# Altium PCB BlanceCar.PcbDoc
Units mil, origin at the board's own origin, x right, y up, seen from the top; angles counter-clockwise.
Board outline 6000 x 4000 mil, 2 copper layers (Top Layer, Bottom Layer); 138 components, 110 nets, 503 pads, 0 vias.
Unrouted connection lines stored in the file: 323.
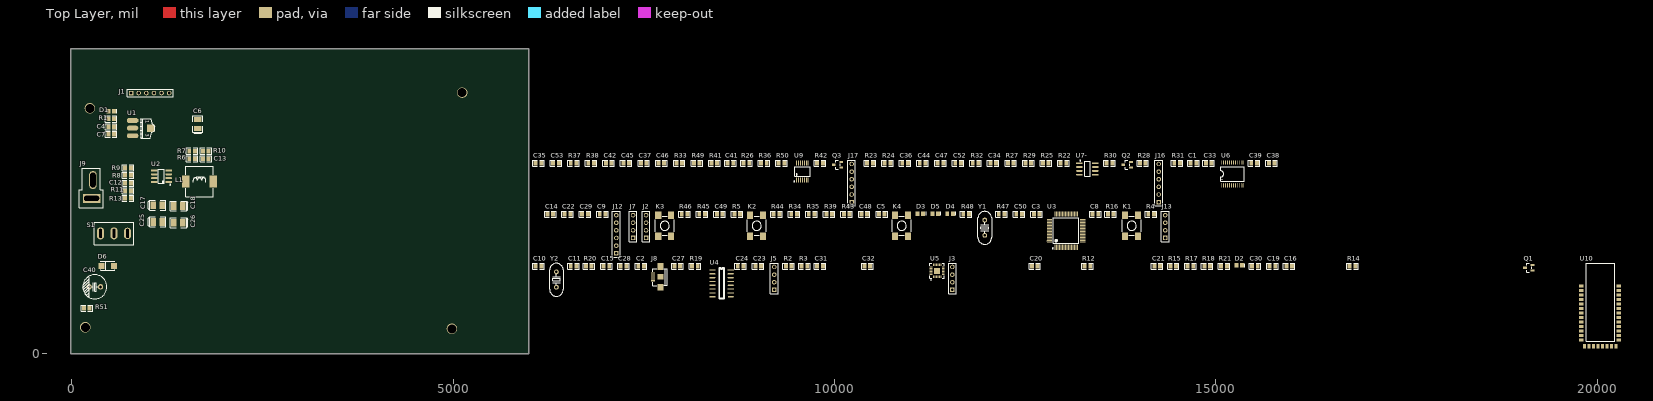
[diagram p0: Top Layer view]
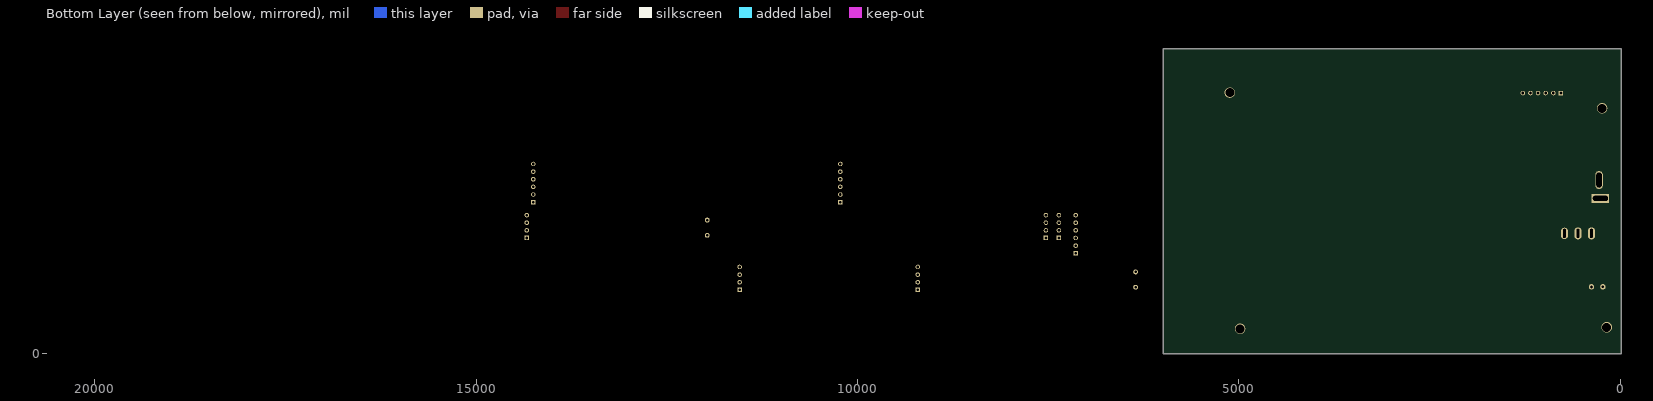
[diagram p1: Bottom Layer view, seen from below]

## Layer stack, top to bottom
Top Layer: signal copper 1.4
Dielectric: dielectric 12.6, FR-4, Dk 4.8
Bottom Layer: signal copper 1.4

## Board outline
-10,0 5990,0 5990,4000 -10,4000

## Design rules (kind name [scope] priority, off if disabled: settings)
Clearance [All] p1: gap=10
ComponentClearance [All] p1: gap=10 collisioncheckmode=3 verticalgap=10
PolygonConnect [All] p1: connectstyle=Relief reliefconductorwidth=10 reliefentries=4 polygonreliefangle="90 Angle"
RoutingVias [All] p1: holewidth=28 width=50 viastyle="Through Hole" minholewidth=28 minwidth=50 maxholewidth=28 maxwidth=50
SolderMaskExpansion [All] p1: expansion=4
TestPointUsage [All] p1: valid=0 allowmultiple=FALSE
Testpoint [All] p1: side=15 testpointundercomponent=TRUE minsize=40 maxsize=100 preferedsize=60 minholesize=0 maxholesize=40 preferedholesize=32 testpointgrid=1 style=1023 order=0123456789
Width [All] p1: maxlimit=10 minlimit=10 preferedwidth=10
18 further rules are at their usual default settings.

## Classes and differential pairs
component class BlancerCar: C2 C4 C6 C7 C10 C11 C12 C13 C15 C16 C17 C18 C19 C20 C21 C23 C24 C25 C26 C27 C28 C30 C31 C32 C40 D1 D2 D6 J3 J5 J8 J9 L1 Q1 R1 R2 R3 R6 R7 R8 R9 R10 R11 R12 R13 R14 R15 R17 R18 R19 R20 R21 R51 S1 U1 U2 U4 U5 U10 Y2
component class BlancerCarMotoDriver: C1 C33 C34 C35 C36 C37 C38 C39 C41 C42 C44 C45 C46 C47 C52 C53 J16 J17 Q2 Q3 R22 R23 R24 R25 R26 R27 R28 R29 R30 R31 R32 R33 R36 R37 R38 R41 R42 R49 R50 U6 U7- U9
component class BlancerCarMicrocontrollers: C3 C5 C8 C9 C14 C22 C29 C48 C49 C50 D3 D4 D5 J1 J2 J7 J12 J13 K1 K2 K3 K4 R4 R5 R16 R34 R35 R39 R43 R44 R45 R46 R47 R48 U3 Y1

## Components (designator, comment, footprint, x,y, rotation, side; value= is the part's Value field where it differs from the comment)
C1 "Cap" 0805-1 14705,2500 r0 top
C2 "Cap" 0805-1 7465,1150 r0 top
C3 "Cap" 0805-1 12650,1830 r0 top
C4 "Cap" 0805-1 520,2980 r0 top
C5 "Cap" 0805-1 10620,1830 r0 top
C6 "Cap钽电容" 钽电容XDH 1660,3020 r270 top
C7 "Cap" 0805-1 520,2880 r0 top
C8 "Cap" 0805-1 13420,1830 r0 top
C9 "Cap" 0805-1 6960,1830 r0 top
C10 "Cap" 0805-1 6120,1150 r0 top
C11 "Cap" 0805-1 6580,1150 r0 top
C12 "Cap" 0805-1 740,2240 r180 top
C13 "Cap" 0805-1 1760,2560 r180 top
C14 "Cap" 0805-1 6275,1830 r0 top
C15 "Cap" 0805-1 7010,1150 r0 top
C16 "Cap" 0805-1 15960,1150 r0 top
C17 "Cap钽电容" 钽电容XDH 1135,1945 r180 top
C18 "Cap钽电容" 钽电容XDH 1395,1945 r0 top
C19 "Cap" 0805-1 15740,1150 r0 top
C20 "Cap" 0805-1 12625,1150 r0 top
C21 "Cap" 0805-1 14230,1150 r0 top
C22 "Cap" 0805-1 6500,1830 r0 top
C23 "Cap" 0805-1 9000,1150 r0 top
C24 "Cap" 0805-1 8770,1150 r0 top
C25 "Cap钽电容" 钽电容XDH 1135,1725 r180 top
C26 "Cap钽电容" 钽电容XDH 1395,1725 r0 top
C27 "Cap" 0805-1 7940,1150 r0 top
C28 "Cap" 0805-1 7235,1150 r0 top
C29 "Cap" 0805-1 6730,1830 r0 top
C30 "Cap" 0805-1 15510,1150 r0 top
C31 "Cap" 0805-1 9810,1150 r0 top
C32 "Cap" 0805-1 10430,1150 r0 top
C33 "Cap" 0805-1 14905,2500 r0 top
C34 "Cap" 0805-1 12080,2500 r0 top
C35 "Cap" 0805-1 6120,2500 r0 top
C36 "Cap" 0805-1 10925,2500 r0 top
C37 "Cap" 0805-1 7500,2500 r0 top
C38 "Cap" 0805-1 15730,2500 r0 top
C39 "Cap" 0805-1 15500,2500 r0 top
C40 "Cap钽电容" 电容220UF 380,880 r180 top
C41 "Cap" 0805-1 8635,2500 r0 top
C42 "Cap" 0805-1 7040,2500 r0 top
C44 "Cap" 0805-1 11155,2500 r0 top
C45 "Cap" 0805-1 7270,2500 r0 top
C46 "Cap" 0805-1 7730,2500 r0 top
C47 "Cap" 0805-1 11390,2500 r0 top
C48 "Cap" 0805-1 10390,1830 r0 top
C49 "Cap" 0805-1 8495,1830 r0 top
C50 "Cap" 0805-1 12420,1830 r0 top
C52 "Cap" 0805-1 11620,2500 r0 top
C53 "Cap" 0805-1 6350,2500 r0 top
D1 "LED0" LED_0805 520,3180 r0 top
D2 "LED0" LED_0805 15305,1160 r0 top
D3 "RED" LED_0805 11125,1840 r0 top
D4 "BLUE" LED_0805 11515,1840 r0 top
D5 "GREEN" LED_0805 11320,1840 r0 top
D6 "肖基特二极管" SS54 480,1160 r0 top
J1 "SIP-1" HDR1X6 780,3420 r0 top
J2 "SIP-4" HDR1X4 7530,1520 r90 top
J3 "SIP_4" HDR1X4 11545,840 r90 top
J5 "Header 4" HDR1X4 9210,840 r90 top
J7 "Header 4" HDR1X4 7360,1520 r90 top
J8 "USB_M" USB_MICRO 7720,1010 r90 top
J9 "Header 2" T字公头 280,2280 r180 top
J12 "Header 6" HDR1X6 7140,1320 r90 top
J13 "SIP-4" HDR1X4 14335,1520 r90 top
J16 "Header 6" HDR1X6 14250,1990 r90 top
J17 "Header 6" HDR1X6 10225,1990 r90 top
K1 "SW-PB4" SW_PB4_A1 13895,1680 r90 top
K2 "SW-PB4" SW_PB4_A1 8980,1680 r90 top
K3 "SW-PB4" SW_PB4_A1 7775,1680 r90 top
K4 "SW-PB4" SW_PB4_A1 10880,1680 r90 top
L1 "Inductor" 33uh电感 1500,2260 r270 top
Q1 "肖基特二极管" BAT54S(SOT-23-3) 19105,1130 r0 top
Q2 "肖基特二极管" BAT54S(SOT-23-3) 13840,2480 r0 top
Q3 "肖基特二极管" BAT54S(SOT-23-3) 10045,2480 r0 top
R1 "Res1" 0805-1 520,3080 r180 top
R2 "Res1" 0805-1 9400,1150 r0 top
R3 "Res1" 0805-1 9605,1150 r0 top
R4 "Res1" 0805-1 14150,1830 r0 top
R5 "Res1" 0805-1 8725,1830 r0 top
R6 "Res1" 0805-1 1580,2560 r0 top
R7 "Res1" 0805-1 1580,2660 r180 top
R8 "Res1" 0805-1 740,2340 r0 top
R9 "Res1" 0805-1 740,2440 r0 top
R10 "Res1" 0805-1 1760,2660 r180 top
R11 "Res1" 0805-1 740,2140 r180 top
R12 "Res1" 0805-1 13315,1150 r0 top
R13 "Res1" 0805-1 740,2040 r0 top
R14 "Res1" 0805-1 16790,1150 r0 top
R15 "Res1" 0805-1 14440,1150 r0 top
R16 "Res1" 0805-1 13620,1830 r0 top
R17 "Res1" 0805-1 14665,1150 r0 top
R18 "Res1" 0805-1 14885,1150 r0 top
R19 "Res1" 0805-1 8170,1150 r0 top
R20 "Res1" 0805-1 6780,1150 r0 top
R21 "Res1" 0805-1 15105,1150 r0 top
R22 "Res1" 0805-1 13000,2500 r0 top
R23 "Res1" 0805-1 10465,2500 r0 top
R24 "Res1" 0805-1 10695,2500 r0 top
R25 "Res1" 0805-1 12770,2500 r0 top
R26 "Res1" 0805-1 8845,2500 r0 top
R27 "Res1" 0805-1 12310,2500 r0 top
R28 "Res1" 0805-1 14040,2500 r0 top
R29 "Res1" 0805-1 12540,2500 r0 top
R30 "Res1" 0805-1 13605,2500 r0 top
R31 "Res1" 0805-1 14490,2500 r0 top
R32 "Res1" 0805-1 11850,2500 r0 top
R33 "Res1" 0805-1 7965,2500 r0 top
R34 "Res1" 0805-1 9470,1830 r0 top
R35 "Res1" 0805-1 9700,1830 r0 top
R36 "Res1" 0805-1 9075,2500 r0 top
R37 "Res1" 0805-1 6580,2500 r0 top
R38 "Res1" 0805-1 6810,2500 r0 top
R39 "Res1" 0805-1 9930,1830 r0 top
R41 "Res1" 0805-1 8425,2500 r0 top
R42 "Res1" 0805-1 9810,2500 r0 top
R43 "Res1" 0805-1 10160,1830 r0 top
R44 "Res1" 0805-1 9240,1830 r0 top
R45 "Res1" 0805-1 8265,1830 r0 top
R46 "Res1" 0805-1 8035,1830 r0 top
R47 "Res1" 0805-1 12190,1830 r0 top
R48 "Res1" 0805-1 11725,1830 r0 top
R49 "Res1" 0805-1 8195,2500 r0 top
R50 "Res1" 0805-1 9305,2500 r0 top
R51 "Res1" 0805-1 200,600 r180 top
S1 "SW-PB" "开关 6A" 380,1580 r90 top
U1 "ASM1117" ASM1117 800,3060 r270 top
U2 "RT7272B" SOIC_8(LC) 1180,2320 r90 top
U3 "stm32f103RBT6" STM32F103RBT6(LQFP-64) 13025,1625 r0 top
U4 "CH340" SOP16 8400,1100 r0 top
U5 "MPU6050" MPU6050 11345,1090 r0 top
U6 "TB6612" TB6612 15075,2210 r0 top
U7- "LM358" NSO8_N 13315,2425 r0 top
U9 "74HC14PW" SSOP-14 9575,2400 r0 top
U10 "蓝牙模块" LANYA 19790,890 r0 top
Y1 "8MHZ" "晶振 8M" 11970,1555 r90 top
Y2 "12MHZ" "晶振 8M" 6355,875 r90 top

## Footprints (in the part's own frame and the unit in brackets; to place one, negate y for a bottom-side part, rotate by r counter-clockwise, add the part's x,y. Pads: shape width x height; smd on the part's side, far side on the other; paste and mask are expansions set on the pad)
33uh电感 [mm]
  rect 4x2.5 smd: 1(0,0) 2(0,9)
  silkscreen extent -5.08,0 5.08,9.14
0805-1 [mm] "贴片带丝印"
  rect 1.3x1.5 smd: 1(-0.95,0) 2(0.95,0)
  silkscreen extent -1.91,-1.02 1.91,1.02, body extent -1.14,-0.51 1.14,0.51, height 1
ASM1117 [mil]
  oct 65x150 smd: 1(0,0)
  oval 65x150 smd: 2(100,0) 3(200,0)
  rect 100x100 smd: 4(100,240)
  silkscreen extent -26,100 234,293
BAT54S(SOT-23-3) [mm] "肖基特二极管SOT-23-3"
  rect 1.25x0.7 smd: 1(1.135,-0.959) 2(-1.365,-0.009) 3(1.135,0.941)
  silkscreen extent -0.76,-1.47 0.78,1.45, body extent -1.61,-1.51 1.39,1.49, height 1.3
HDR1X4 [mm] "Connector; Header; 4 Position"
  rect 1.5x1.5 hole 0.9: 1(0,0)
  round 1.5 hole 0.9: 2(2.54,0) 3(5.08,0) 4(7.62,0)
  silkscreen extent -1.27,-1.27 8.89,1.27
HDR1X6 [mm] "Connector; Header; 6 Position"
  rect 1.5x1.5 hole 0.9: 1(0,0)
  round 1.5 hole 0.9: 2(2.54,0) 3(5.08,0) 4(7.62,0) 5(10.16,0) 6(12.7,0)
  silkscreen extent -1.27,-1.27 13.97,1.27
LANYA [mm]
  rect 1.5x1 smd: 1(0,0) 2(0,-1.5) 3(0,-3) 4(0,-4.5) 5(0,-6) 6(0,-7.5) 7(0,-9) 8(0,-10.5) 9(0,-12) 10(0,-13.5) 11(0,-15) 12(0,-16.5) 13(0,-18) 22(12.5,-18) 23(12.5,-16.5) 24(12.5,-15) 25(12.5,-13.5) 26(12.5,-12) 27(12.5,-10.5) 28(12.5,-9) 29(12.5,-7.5) 30(12.5,-6) 31(12.5,-4.5) 32(12.5,-3) 33(12.5,-1.5) 34(12.5,0)
  rect 1x1.5 smd: 14(1,-20) 15(2.5,-20) 16(4,-20) 17(5.5,-20) 18(7,-20) 19(8.5,-20) 20(10,-20) 21(11.5,-20)
  silkscreen extent 1.55,-18.41 11.07,7.62
LED_0805 [mm] "贴片二极管"
  rect 1.3x1.5 smd: 1(-0.95,0) 2(0.95,0)
  silkscreen extent 1.91,-0.64 1.91,0.64
MPU6050 [mm]
  rect 0.25x0.9 smd: 1(-1.25,-2) 2(-0.75,-2) 3(-0.25,-2) 4(0.25,-2) 5(0.75,-2) 6(1.25,-2) 13(1.25,2) 14(0.75,2) 15(0.25,2) 16(-0.25,2) 17(-0.75,2) 18(-1.25,2)
  rect 0.9x0.25 smd: 7(2,-1.25) 8(2,-0.75) 9(2,-0.25) 10(2,0.25) 11(2,0.75) 12(2,1.25) 19(-2,1.25) 20(-2,0.75) 21(-2,0.25) 22(-2,-0.25) 23(-2,-0.75) 24(-2,-1.25)
  rect 2x2 smd: ""(0,0)
  silkscreen extent -2.41,-3.2 2.44,2.51
NSO8_N [mm] "SOIC-max660"
  oval 2.2x0.6 smd: 1(-2.654,1.905) 2(-2.654,0.635) 3(-2.654,-0.635) 4(-2.654,-1.905) 5(2.654,-1.905) 6(2.654,-0.635) 7(2.654,0.635) 8(2.654,1.905)
  silkscreen extent -2.52,-2.5 0.9,2.88, body extent -1.95,-2.45 1.95,2.45, height 1.75
SOIC_8(LC) [mm]
  oval 0.7x2.2 smd: 1(-1.657,-2.369) 2(-0.387,-2.369) 3(0.883,-2.369) 4(2.153,-2.369) 5(2.153,2.431) 6(0.883,2.431) 7(-0.387,2.431) 8(-1.657,2.431)
  silkscreen extent -2.7,-3.02 2.65,1.03
SOP16 [mil]
  rect 80x16 smd: 1(0,0)
  oval 80x16 smd: 2(0,-50) 3(0,-100) 4(0,-150) 5(0,-200) 6(0,-250) 7(0,-300) 8(0,-350) 9(240,-350) 10(240,-300) 11(240,-250) 12(240,-200) 13(240,-150) 14(240,-100) 15(240,-50) 16(240,0)
  silkscreen extent 89,-375 151,25
SS54 [mm] "肖基特二极管"
  rect 2x2 smd: 1(1.973,-0.127) 2(-2.227,-0.127)
  silkscreen extent -2.48,-1.63 2.22,1.37
SSOP-14 [mm] "74HC14PW"
  oval 0.32x1.7 smd: 1(-1.85,-3.05) 2(-1.2,-3.05) 3(-0.55,-3.05) 4(0.1,-3.05) 5(0.75,-3.05) 6(1.4,-3.05) 7(2.05,-3.05) 8(2.05,2.65) 9(1.4,2.65) 10(0.75,2.65) 11(0.1,2.65) 12(-0.55,2.65) 13(-1.2,2.65) 14(-1.85,2.65)
  silkscreen extent -2.75,-3.65 2.65,1.4
STM32F103RBT6(LQFP-64) [mm] "LQFP-64"
  oval 0.28x1.8 smd mask+0.051: 1(-3.475,-5.775) 2(-2.975,-5.775) 3(-2.475,-5.775) 4(-1.975,-5.775) 5(-1.475,-5.775) 6(-0.975,-5.775) 7(-0.475,-5.775) 8(0.025,-5.775) 9(0.525,-5.775) 10(1.025,-5.775) 11(1.525,-5.775) 12(2.025,-5.775) 13(2.525,-5.775) 14(3.025,-5.775) 15(3.525,-5.775) 16(4.025,-5.775) 33(4.025,5.325) 34(3.525,5.325) 35(3.025,5.325) 36(2.525,5.325) 37(2.025,5.325) 38(1.525,5.325) 39(1.025,5.325) 40(0.525,5.325) 41(0.025,5.325) 42(-0.475,5.325) 43(-0.975,5.325) 44(-1.475,5.325) 45(-1.975,5.325) 46(-2.475,5.325) 47(-2.975,5.325) 48(-3.475,5.325)
  oval 1.8x0.28 smd mask+0.051: 17(5.825,-3.975) 18(5.825,-3.475) 19(5.825,-2.975) 20(5.825,-2.475) 21(5.825,-1.975) 22(5.825,-1.475) 23(5.825,-0.975) 24(5.825,-0.475) 25(5.825,0.025) 26(5.825,0.525) 27(5.825,1.025) 28(5.825,1.525) 29(5.825,2.025) 30(5.825,2.525) 31(5.825,3.025) 32(5.825,3.525) 49(-5.275,3.525) 50(-5.275,3.025) 51(-5.275,2.525) 52(-5.275,2.025) 53(-5.275,1.525) 54(-5.275,1.025) 55(-5.275,0.525) 56(-5.275,0.025) 57(-5.275,-0.475) 58(-5.275,-0.975) 59(-5.275,-1.475) 60(-5.275,-1.975) 61(-5.275,-2.475) 62(-5.275,-2.975) 63(-5.275,-3.475) 64(-5.275,-3.975)
  silkscreen extent -4.27,-6.27 4.53,4.03
SW_PB4_A1 [mil]
  rect 98.42x78.74 smd: 1(-140,85) 2(-140,-85) 3(140,-85) 4(140,85)
  silkscreen extent -125,-125 125,125, body extent -125,-125 125,125, height 236
TB6612 [mm]
  rect 0.22x1.4 smd: 1(0,0)
  oval 0.22x1.4 smd: 2(0.65,0) 3(1.3,0) 4(1.95,0) 5(2.6,0) 6(3.25,0) 7(3.9,0) 8(4.55,0) 9(5.2,0) 10(5.85,0) 11(6.5,0) 12(7.15,0) 13(7.15,7.6) 14(6.5,7.6) 15(5.85,7.6) 16(5.2,7.6) 17(4.55,7.6) 18(3.9,7.6) 19(3.25,7.6) 20(2.6,7.6) 21(1.95,7.6) 22(1.3,7.6) 23(0.65,7.6) 24(0,7.6)
  silkscreen extent -0.33,1.33 7.48,6.27
T字公头 [mm]
  oval 2.5x6 hole 1.75 slot 5 at 90 deg: 1(0,0)
  rect 5.8x3 hole 1.75 slot 5 at 0 deg: 2(0.446,6.096)
  silkscreen extent -3.36,-3.94 4.51,9.27
USB_MICRO [mm] "USB方孔"
  oct 0.4x1.35 smd: 1(-1.3,2.54) 2(-0.65,2.54) 3(0,2.54) 4(0.65,2.54) 5(1.3,2.54)
  rect 2.286x1.9 smd: 6(3.429,0) 7(-3.429,0)
  rect 1.8x1.9 smd: 8(0,0)
  silkscreen extent -2.92,-2.29 2.79,2.67
"开关 6A" [mm]
  oval 4x2.4 hole 0.91 slot 3 at 0 deg: 1(0,0) 2(0,-4.492)
  oval 3.8x2.4 hole 0.91 slot 3 at 0 deg: ""(0,-8.992)
  silkscreen extent -3.74,-11.05 3.68,2.03
"晶振 8M" [mm]
  round 1.6 hole 0.8: 1(0,0) 2(5.08,0)
  silkscreen extent -3,-2.29 7.94,2.29
电容220UF [mm]
  round 1.8 hole 1: 1(0,0)
  round 1.8 hole 0.8: 2(3.81,0)
  silkscreen extent -2.09,-4 5.9,4
钽电容XDH [mm] "钽电容TAJB107K006RNJ"
  rect 1.8x2.6 smd: 1(1.643,-0.133) 2(-1.357,-0.133)
  silkscreen extent -2.58,-1.78 3.31,1.52, body extent -1.71,-1.6 1.99,1.33, height 2.03

## Part data
C1 C2 C3 C4 C5 C7 C8 C9 C10 C11 C12 C13 C14 C15 C16 C19 C20 C21 C22 C23 C24 C27 C28 C29 C30 C31 C32 C33 C34 C35 C36 C37 C38 C39 C41 C42 C44 C45 C46 C47 C48 C49 C50 C52 C53: "Capacitor"
C6 C17 C18 C25 C26 C40: library part Cap-dan
D1 D2: "发光二极管"
D3 D4 D5: library part LED0, "发光二极管"
D6: library part SS54
J1: library part "Header 6", "Header, 6-Pin"
J2 J3 J13: library part "Header 4", "Header, 4-Pin"
J5 J7: "Header, 4-Pin"
J8: "MicroUSB接口"
J9: "Header, 2-Pin"
J12 J16 J17: "Header, 6-Pin"
K1 K2 K3 K4: "微动开关"
Q1 Q2 Q3: library part BAT54S
R1 R2 R3 R4 R5 R6 R7 R8 R9 R10 R11 R12 R13 R14 R15 R16 R17 R18 R19 R20 R21 R22 R23 R24 R25 R26 R27 R28 R29 R30 R31 R32 R33 R34 R35 R36 R37 R38 R39 R41 R42 R43 R44 R45 R46 R47 R48 R49 R50 R51: "贴片电阻"
S1: "Switch"
U2: "RT7272B同步降压型DC-DC转换器"
U5: library part MPU6050_
U7-: "双运放"
U9: "6非门"
U10: library part 蓝牙
Y1 Y2: library part XTAL, "Crystal Oscillator"

## Free pads (board coordinates)
  round 137.8 hole 118.11: 0(240,3220) 1(180,350) 3(4985,330) 4(5120,3425)

## Nets (pads, with @x,y where several pads share a name; then routed paths per layer and width w, separated by ;. In a path a pad name is that pad's centre, name@x,y a point inside that pad or via, vN(x,y) a via of type N, cw(c..) or ccw(c..) an arc to the next point about the centre after c; other vN are vias at no path point)
3V3: C2.2 C4.2 C6.1 C9.2 C14.2 C22.2 C28.2 C29.2 C31.2 C32.2 C48.2 C49.2 C50.2 D3.1 D4.1 D5.1 J1.5 J2.1 J3.4 J5.1 J7.4 K2.2 K2.3 K3.2 K3.3 K4.2 K4.3 Q1.3 Q2.3 Q3.3 R1.1 R2.2 R3.2 R4.1 R5.1 R17.2 R18.2 U1.2 U1.4 U3.1 U3.19 U3.32 U3.48 U3.64 U5.8 U5.13 U9.14
5V: C1.2 C33.2 C35.2 C44.2 C45.2 C53.2 J16.2 J17.2 R31.2 U6.20
5V_USB: C23.2 C24.2 J8.5 U4.16
12V: C38.1 C39.1 U6.13 U6.14 U6.24
+5V: C7.2 C18.1 C20.1 C26.1 L1.2 R9.2 U1.3
+12V: C40.1 D6.2
AGND: C34.1 C35.1 C36.1 C37.1 C38.2 C39.2 C41.1 C42.1 C44.1 C45.1 C46.1 C47.1 C52.1 C53.1 J16.5 J17.5 Q2.1 Q3.1 R23.1 R27.1 R29.1 R32.1 R33.1 R37.2 R41.1 R49.1 R51.2
BAT_IN: C25.1 D6.1 R7.2 S1.2 U2.8
BOOT0: R16.2
BOOT1: U3.60
ECHO: J3.2 U3.26
GND: C1.1 C2.1 C3.1 C4.1 C5.1 C6.2 C7.1 C8.1 C9.1 C10.2 C11.2 C14.1 C15.1 C16.1 C17.2 C18.2 C19.1 C20.2 C21.2 C22.1 C23.1 C24.1 C25.2 C26.2 C27.1 C28.1 C29.1 C30.1 C31.1 C32.1 C33.1 C40.2 D1.2 J1.6 J2.4 J3.1 J5.2 J7.3 J8.1 J9.1 K1.1 K1.4 Q1.1 R8.1 R10.1 R11.1 R13.1 R16.1 R20.1 R21.1 R43.1 R45.1 R47.1 R51.1 U1.1 U2.4 U3.12 U3.18 U3.31 U3.47 U3.63 U4.1 U5.1 U5.11 U5.18 U6.18 U9.7 U10.13 U10.21 U10.22
I2C1_SCL: R12.2 R17.1 U3.61
I2C1_SDA: R15.2 R18.1 U3.62
I_MOTA: C36.2 Q2.2 R25.2 U3.24
I_MOTB: C42.2 Q3.2 R26.1 U3.25
KEY1: U3.45
KEY2: R44.1 U3.53
KEY3: R46.1 U3.57
KEY4: R48.1
LED1: R39.1 U3.9
LED2: R35.1 U3.10
LED3: R34.1 U3.11
MOTA_HA: U3.58 U9.6
MOTA_HB: U3.59 U9.8
MOTA_IH: C34.2 R22.1 R32.2 U6.3 U6.4
MOTA_IN1: J12.3 U3.34 U6.21
MOTA_IN2: J12.2 U3.33 U6.22
MOTA_O1: J16.6 U6.1 U6.2
MOTA_O2: J16.1 U6.5 U6.6
MOTA_PWM: J12.1 U3.44 U6.23
MOTB_HA: U3.14 U9.2
MOTB_HB: U3.15 U9.4
MOTB_IH: C41.2 R33.2 R36.2 U6.9 U6.10
MOTB_IN1: J12.4 U3.35 U6.17
MOTB_IN2: J12.5 U3.36 U6.16
MOTB_O1: J17.1 U6.11 U6.12
MOTB_O2: J17.6 U6.7 U6.8
MOTB_PWM: J12.6 U3.41 U6.15
MPU_INT: R19.1 U3.54
NetC3_2: C3.2 U3.5 Y1.2
NetC5_2: C5.2 U3.6 Y1.1
NetC10_1: C10.1 U4.8 Y2.1
NetC11_1: C11.1 U4.7 Y2.2
NetC12_1: C12.1 U2.6
NetC12_2: C12.2 R11.2
NetC13_1: C13.1 L1.1 U2.1
NetC13_2: C13.2 U2.2
NetC15_2: C15.2 U4.4
NetC17_1: C17.1 R6.1
NetC19_2: C19.2 C30.2 U10.12
NetC21_1: C21.1 U5.20
NetC27_2: C27.2 U5.10
NetC37_2: C37.2 R42.2 U9.1
NetC46_2: C46.2 R50.2 U9.3
NetC47_2: C47.2 R28.2 U9.5
NetC48_1: C48.1 K2.1 K2.4 R43.2 R44.2
NetC49_1: C49.1 K3.1 K3.4 R45.2 R46.2
NetC50_1: C50.1 K4.1 K4.4 R47.2 R48.2
NetC52_2: C52.2 R30.2 U9.9
NetD1_1: D1.1 R1.2
NetD2_1: D2.1 U10.24
NetD2_2: D2.2 R21.2
NetD3_2: D3.2 R34.2
NetD4_2: D4.2 R39.2
NetD5_2: D5.2 R35.2
NetJ1_1: J1.1 U3.23
NetJ1_2: J1.2 U3.22
NetJ1_3: J1.3 U3.21
NetJ1_4: J1.4 U3.20
NetJ8_2: J8.2 U4.6
NetJ8_3: J8.3 U4.5
NetJ16_3: J16.3 R28.1 R29.2
NetJ16_4: J16.4 R27.2 R30.1
NetJ17_3: J17.3 R42.1 R49.2
NetJ17_4: J17.4 R41.2 R50.1
NetR5_2: R5.2 U3.13
NetR6_2: R6.2 U2.3
NetR7_1: R7.1 R10.2 R14.2
NetR8_2: R8.2 R9.1 U2.5
NetR12_1: R12.1 U5.23
NetR13_2: R13.2 U2.7
NetR15_1: R15.1 U5.24
NetR19_2: R19.2 U5.12
NetR20_2: R20.2 U5.9
NetR22_2: R22.2 U7-.3
NetR23_2: R23.2 R24.1 U7-.2
NetR24_2: R24.2 R25.1 U7-.1
NetR26_2: R26.2 R38.1 U7-.7
NetR31_1: R31.1 U6.19
NetR36_1: R36.1 U7-.5
NetR37_1: R37.1 R38.2 U7-.6
NRST: C8.2 K1.2 K1.3 R4.2 U3.7
PA2: J2.2 U3.16
PA3: J2.3 U3.17
PA9: U3.42 U4.3
PA10: U3.43 U4.2
PC0: C16.2 Q1.2 R14.1 U3.8
SCL_OLED: J5.3 R3.1 U3.29
SDA_OLED: J5.4 R2.1 U3.30
SWCLK: J7.1 U3.49
SWDIO: J7.2 U3.46
TIM8_CH1: J13.1 U3.40
TIM8_CH2: J13.2 U3.39
TIM8_CH3: J13.3 U3.38
TIM8_CH4: J13.4 U3.37
TRIG: J3.3 U3.27
USART4_RX: U3.52 U10.1
USART4_TX: U3.51 U10.2
VBAT: J9.2 S1.1
pads on no net: J8.4 J8.6 J8.7 J8.8 S1. U3.2 U3.3 U3.4 U3.28 U3.50 U3.55 U3.56 U4.9 U4.10 U4.11 U4.12 U4.13 U4.14 U4.15 U5. U5.2 U5.3 U5.4 U5.5 U5.6 U5.7 U5.14 U5.15 U5.16 U5.17 U5.19 U5.21 U5.22 U7-.4 U7-.8 U9.10 U9.11 U9.12 U9.13 U10.3 U10.4 U10.5 U10.6 U10.7 U10.8 U10.9 U10.10 U10.11 U10.14 U10.15 U10.16 U10.17 U10.18 U10.19 U10.20 U10.23 U10.25 U10.26 U10.27 U10.28 U10.29 U10.30 U10.31 U10.32 U10.33 U10.34

## Text inside footprints (layer, text, board x,y; h text height)
U1: Top Overlay "1" at 973,3066 h50 r270; Top Overlay "3" at 973,2886 h50 r270